# Altium PCB ETU.PcbDoc
Units mm, origin at the board's own origin, x right, y up, seen from the top; angles counter-clockwise.
Board outline 35.27 x 34.42 mm, 2 copper layers (Top Layer, Bottom Layer); 2 components, 3 nets, 3 pads, 0 vias.
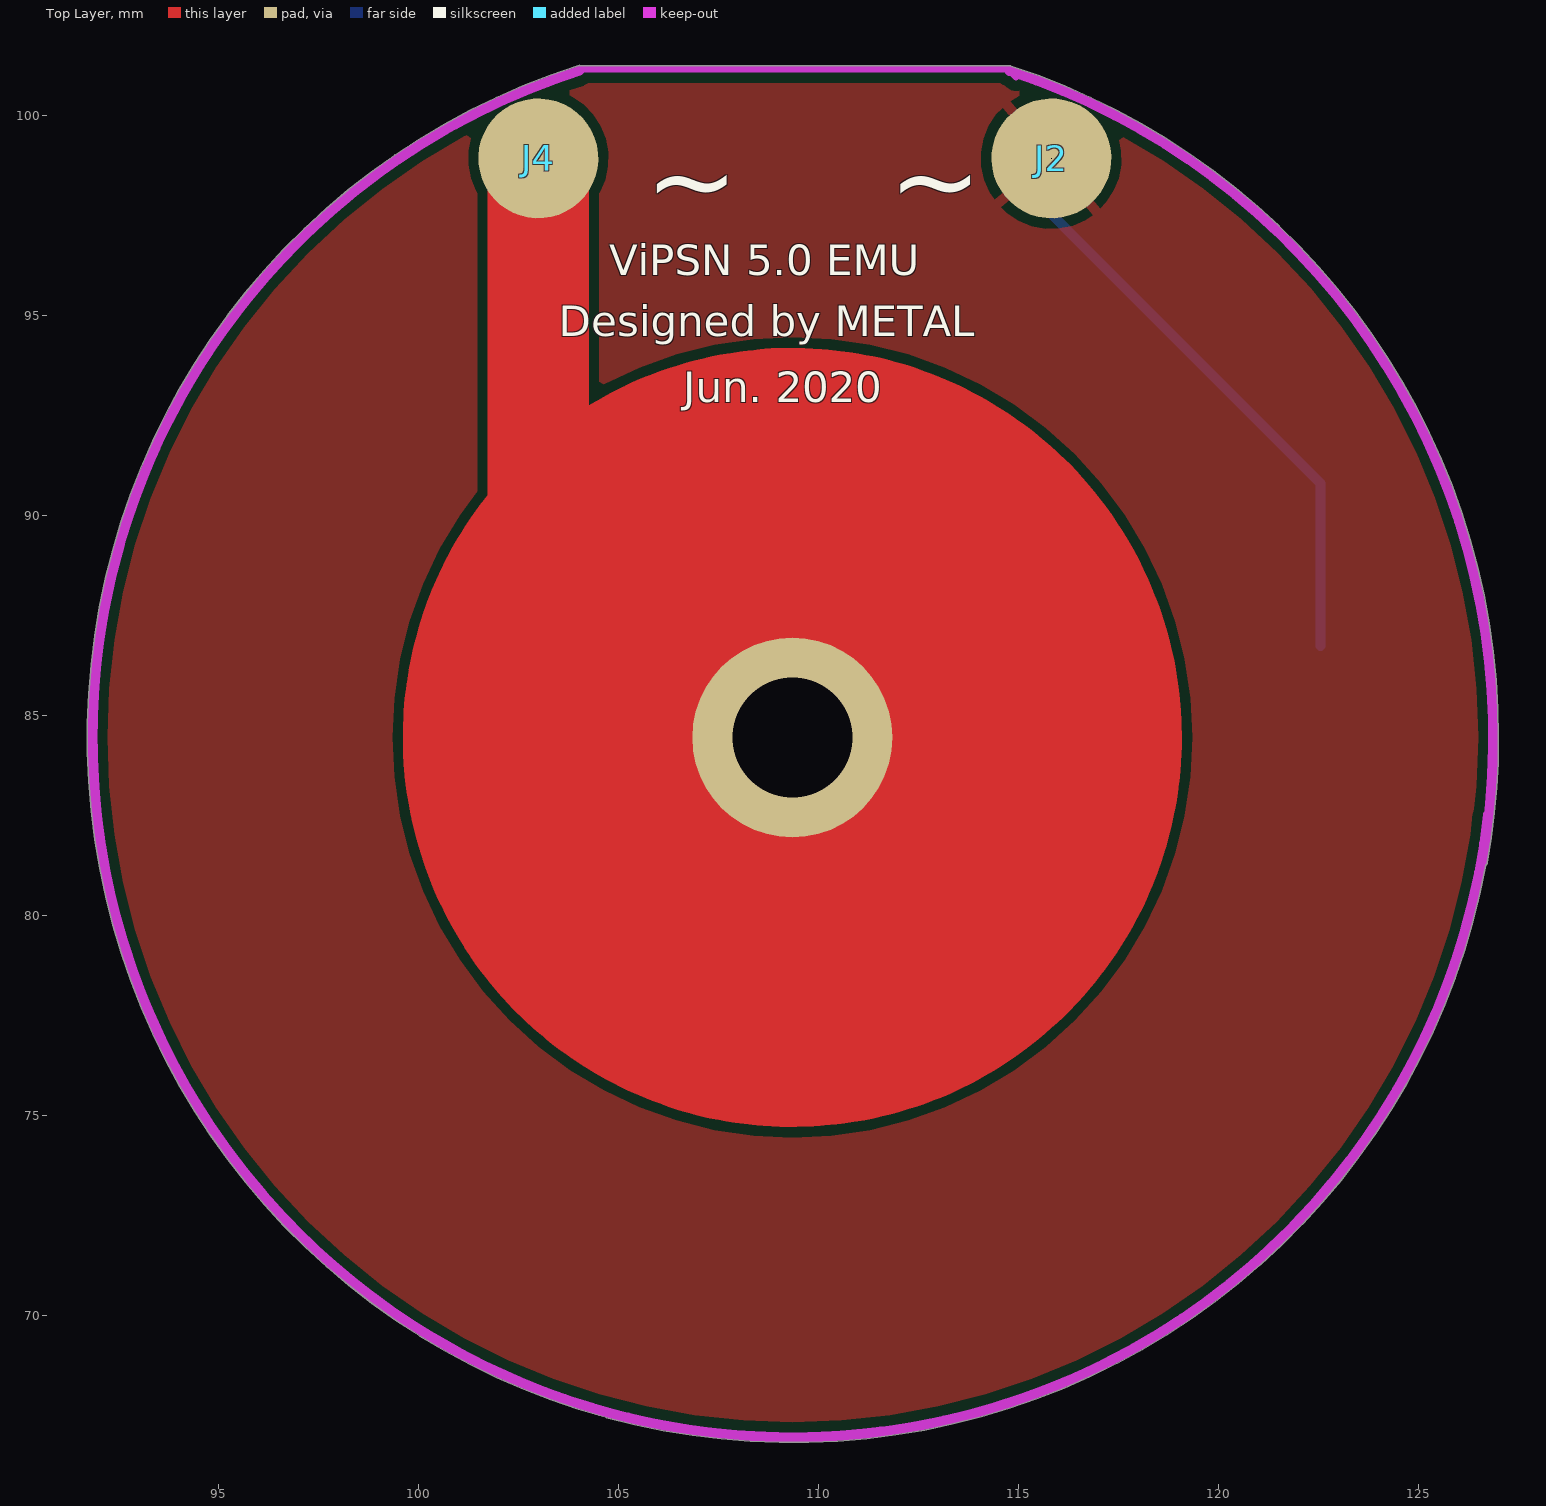
[diagram p0: Top Layer view]
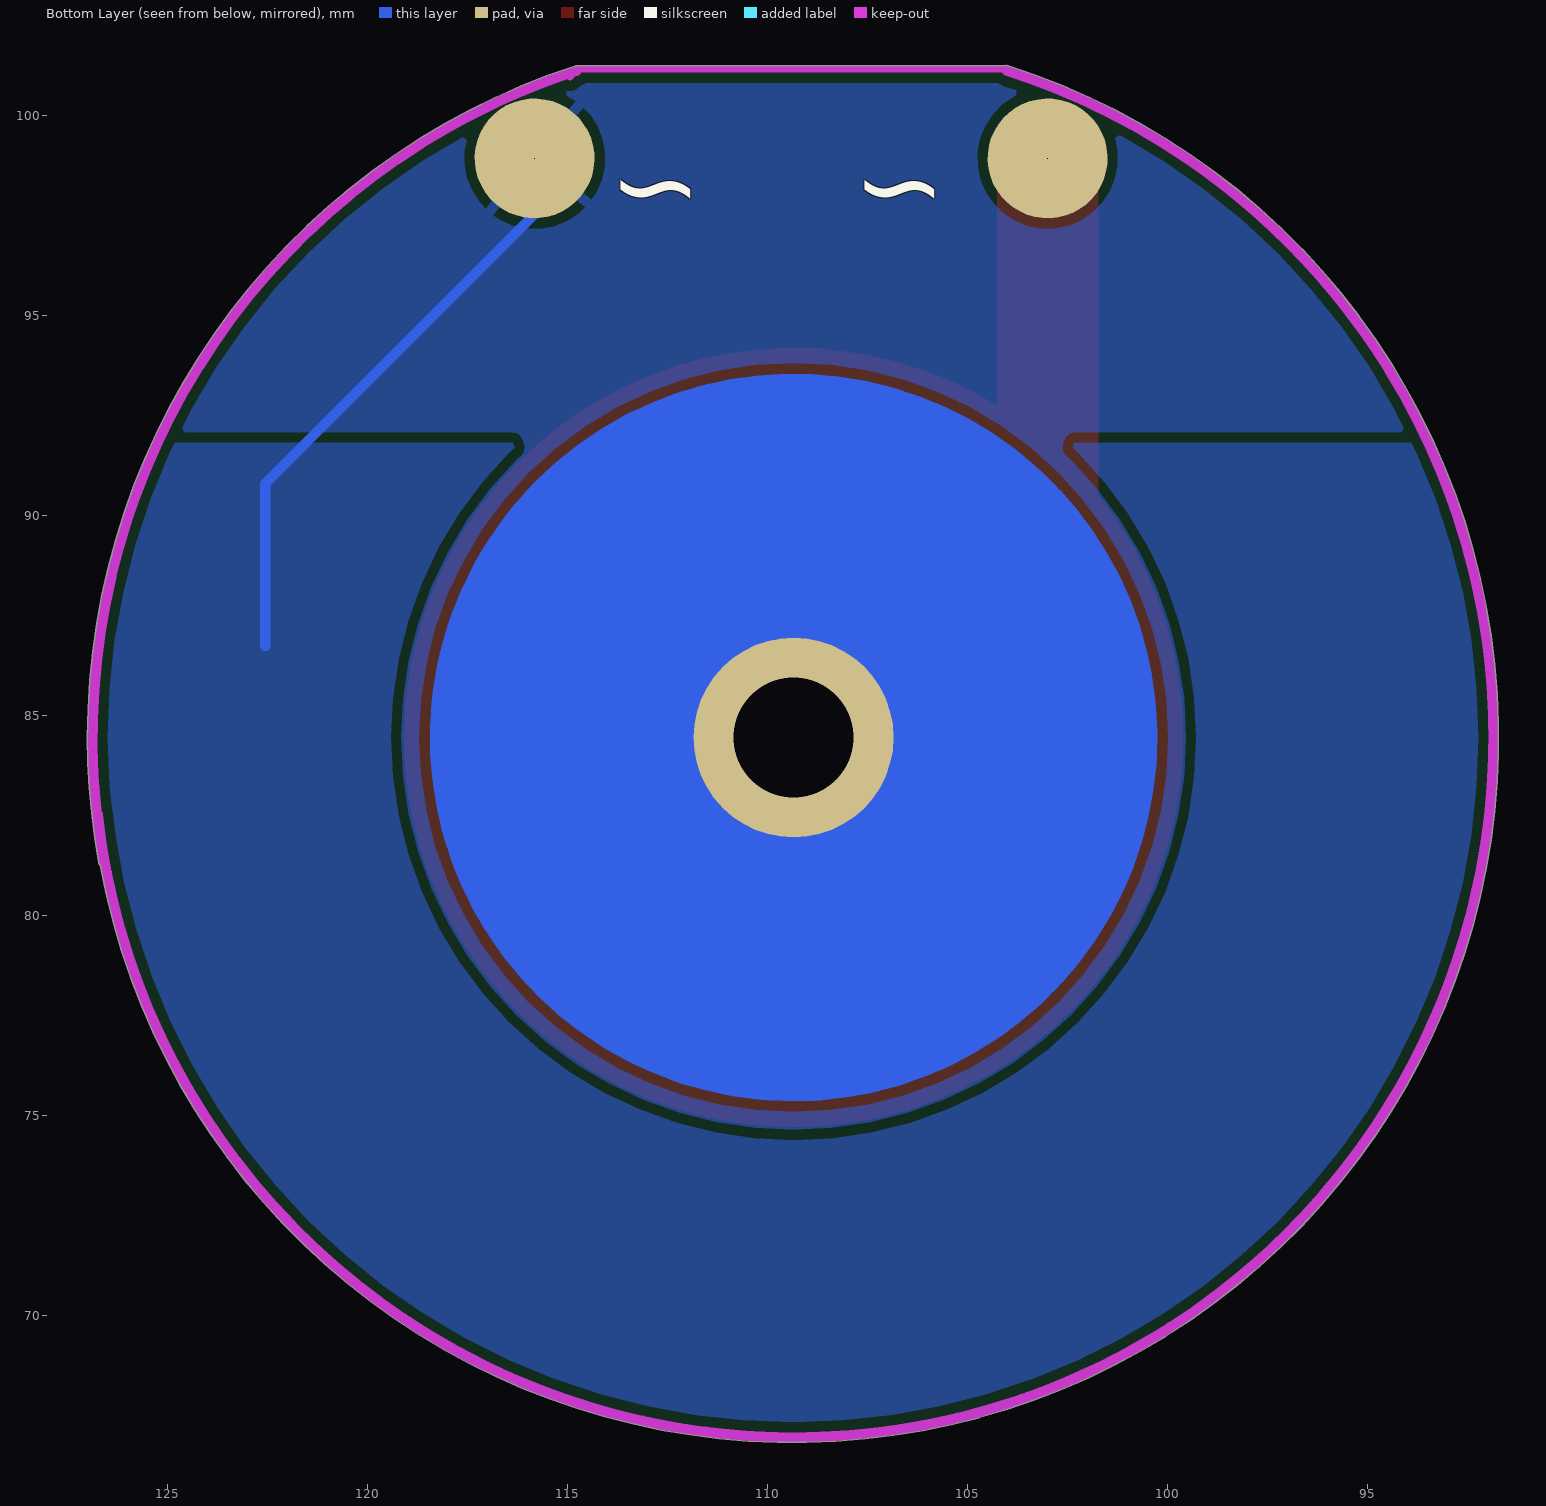
[diagram p1: Bottom Layer view, seen from below]

## Layer stack, top to bottom
Top Layer: signal copper 0.0356
Dielectric: dielectric 0.32, FR-4, Dk 4.8
Bottom Layer: signal copper 0.0356

## Board outline
114.737,101.252 cw(c114.737,101.163) 114.767,101.247 cw(c114.773,101.12) 114.812,101.241 cw(c109.347,84.455) 127,84.455 cw(c109.347,84.455) 126.721,81.328 cw(c126.596,81.351) 126.684,81.259 cw(c109.349,84.457) 103.986,101.249 cw(c104.024,101.128) 104.05,101.252

## Design rules (kind name [scope] priority, off if disabled: settings)
Clearance [All] p1: gap=0.254
PolygonConnect [All] p1: connectstyle=Relief reliefconductorwidth=0.254 reliefentries=4 polygonreliefangle="90 Angle"
RoutingVias [All] p1: holewidth=0.711 width=1.27 viastyle="Through Hole" minholewidth=0.711 minwidth=1.27 maxholewidth=0.711 maxwidth=1.27
SilkscreenOverComponentPads [All] p1: minsilkscreentomaskgap=0.254
SolderMaskExpansion [All] p1: expansion=0.102
Width [All] p1: maxlimit=0.254 minlimit=0.254 preferedwidth=0.254
27 further rules are at their usual default settings.

## Components (designator, comment, footprint, x,y, rotation, side; value= is the part's Value field where it differs from the comment)
J2 "Socket" PIN1 115.824,98.933 r130 top
J4 "Socket" PIN1 102.997,98.933 r230 top

## Footprints (in the part's own frame and the unit in brackets; to place one, negate y for a bottom-side part, rotate by r counter-clockwise, add the part's x,y. Pads: shape width x height; smd on the part's side, far side on the other; paste and mask are expansions set on the pad)
PIN1 [mm] "Connector; Plug"
  round 3 hole 0.015: 1(0,0)

## Free pads (board coordinates)
  round 5 hole 3: 0(109.347,84.455)

## Nets (pads, with @x,y where several pads share a name; then routed paths per layer and width w, separated by ;. In a path a pad name is that pad's centre, name@x,y a point inside that pad or via, vN(x,y) a via of type N, cw(c..) or ccw(c..) an arc to the next point about the centre after c; other vN are vias at no path point)
GND: 
VIN+: J2.1 | length 15
  Bottom Layer w0.254: J2.1 115.824,97.536 122.555,90.805 122.555,86.741
VIN-: J4.1 pad.0 | length 70.4
  Top Layer w7.62: 108.601,90.338 ccw(c109.347,84.455) 108.603,90.338
  Bottom Layer w7.62: 108.683,89.695 ccw(c109.347,84.455) 108.684,89.696

## Polygon pours and split planes (outlines as drawn)
no net on Bottom Layer "Top Layer-No Net" (solid, remove dead copper): 127.508,91.821 88.9,91.821 88.9,64.008 90.551,62.357 90.678,62.23 128.651,62.23 128.651,89.916 126.492,92.075
VIN+ on Bottom Layer "Top Layer-No Net" (solid, remove dead copper): 87.376,103.378 88.392,104.394 132.842,104.394 132.842,71.374 123.698,62.23 121.793,64.135 89.027,64.135 89.027,104.14 90.424,105.537
VIN+ on Top Layer "Top Layer-No Net" (solid, remove dead copper): 90.551,102.489 91.059,102.997 130.556,102.997 130.556,72.009 123.063,64.516 120.904,62.357 91.821,62.357 91.821,100.33 95.123,103.632
VIN+ on Bottom Solder "Top Layer-No Net" (solid, remove dead copper): 127.508,91.821 88.9,91.821 88.9,64.008 90.551,62.357 90.678,62.23 128.651,62.23 128.651,89.916 126.492,92.075

## Keep-outs
Keep-Out Layer:
  lines w0.178: 104.024,101.163 114.737,101.163 114.935,100.965
  lines w0.254: 102.87,100.714 ccw(c109.349,84.457) 126.742,82.522 cw(c109.349,84.457) 104.024,101.128 ; 114.773,101.12 cw(c109.347,84.455) 126.596,81.351

## Other copper
Top Layer:
  rectangle net VIN-: 101.727,87.249 104.267,98.806

## Silkscreen, mask and mechanical layers (free items; w line width, h text height)
Top Overlay:
  text "~" at 105.664,97.409 h2.03
  text "~" at 111.76,97.409 h2.03
  text "ViPSN 5.0 EMU" at 104.775,96.012 h0.76
  text "Designed by METAL" at 103.505,94.488 h0.76
  text "Jun. 2020" at 106.616,92.837 h0.76
Bottom Overlay:
  text "~" at 105.537,97.282 h2.03
  text "~" at 111.633,97.282 h2.03
Bottom Solder:
  lines w7.62: 107.67,97.684 ccw(c109.347,84.455) 107.674,97.685 ; 108.685,89.676 ccw(c109.347,84.455) 108.687,89.676